# Altium PCB pay-optical.PcbDoc (part 2 of 5)
Units mm, origin at the board's own origin, x right, y up, seen from the top; angles counter-clockwise.
Board outline 128 x 54 mm, 4 copper layers (Top Layer, GND, VCC, Bottom Layer), stack 0.778 mm thick; 461 components, 247 nets, 1368 pads, 498 vias.
Unrouted connection lines stored in the file: 117.
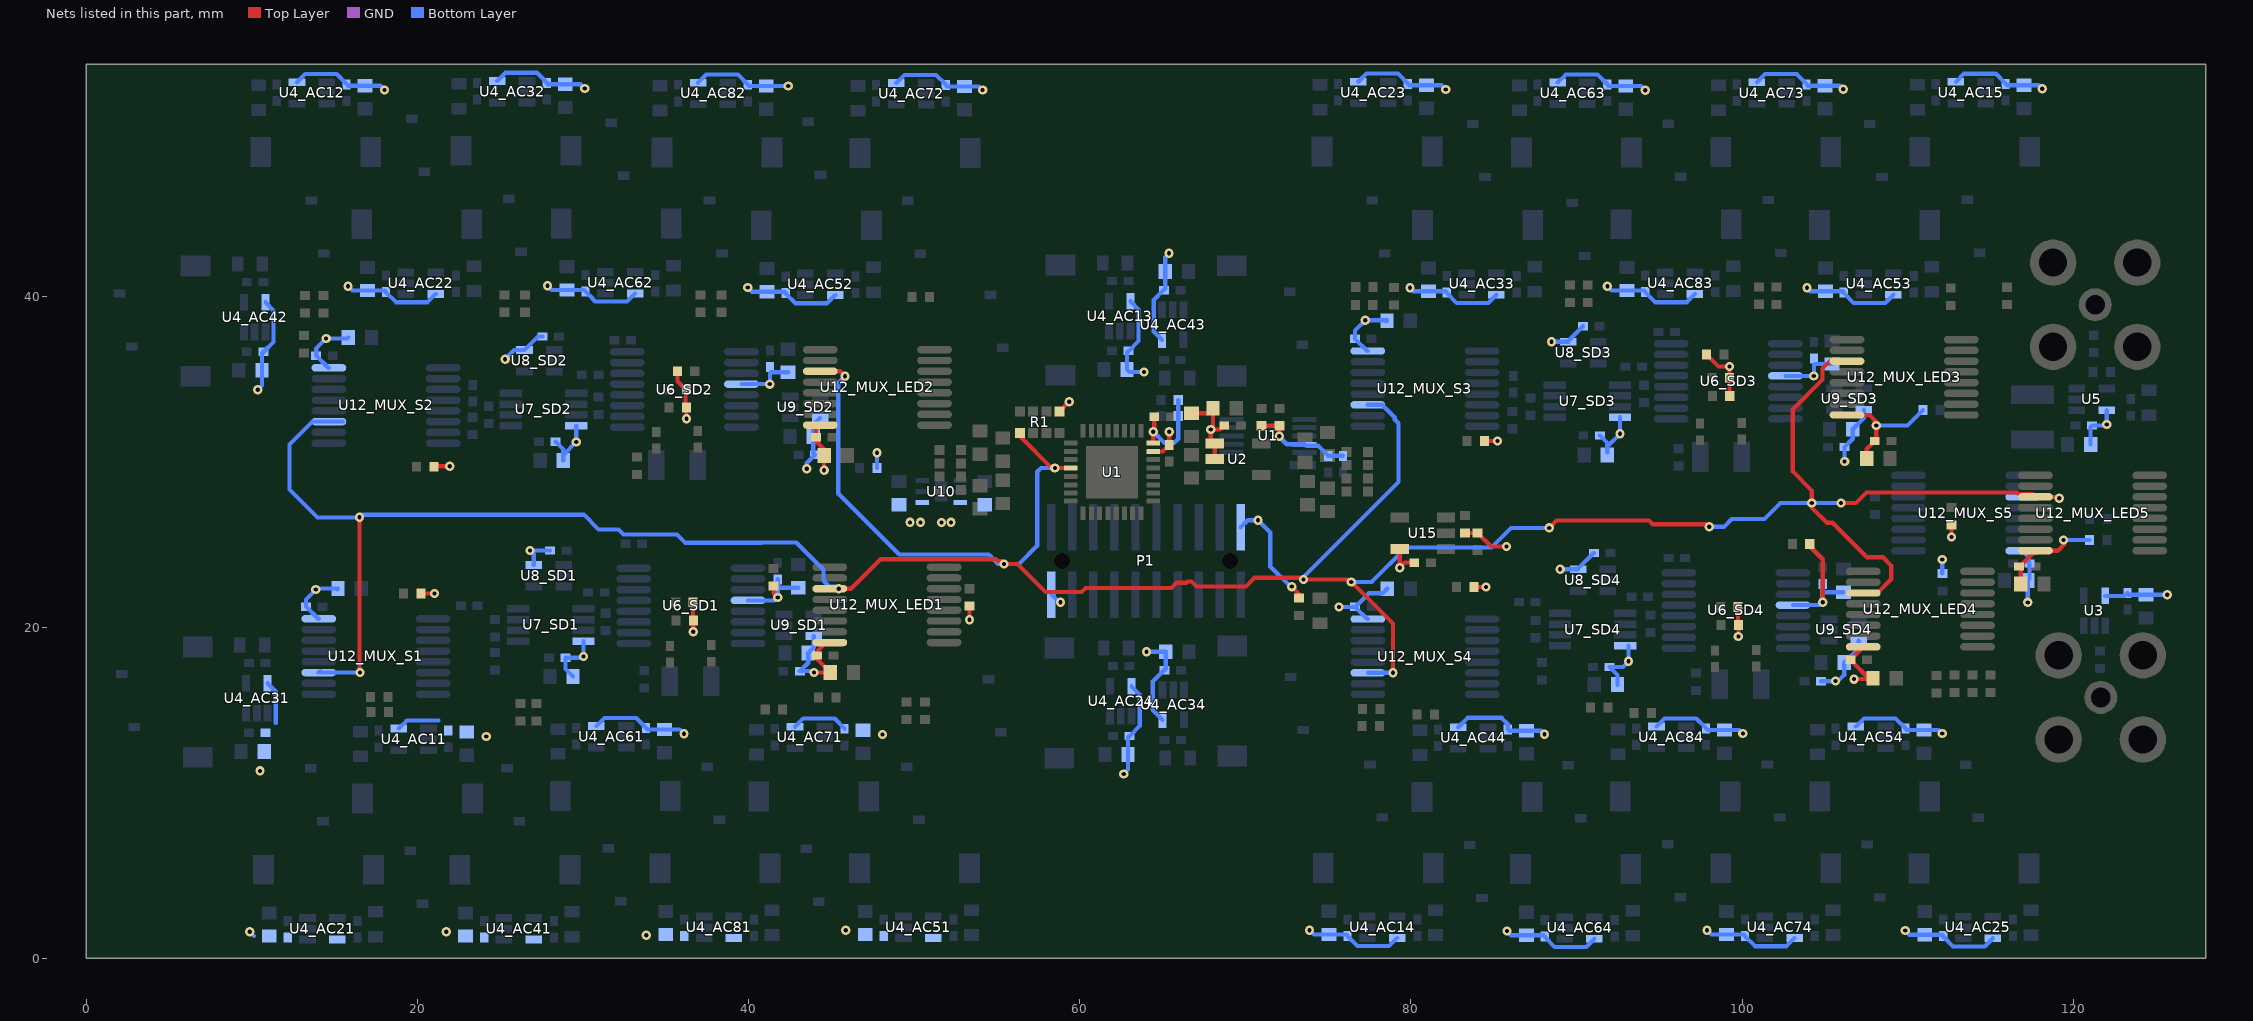
[diagram p4: the nets of this part, all layers, seen from the top]

## Components (designator, comment, footprint, x,y, rotation, side; value= is the part's Value field where it differs from the comment) (continued)
R8_AC71 "330" 0402#2 49.53,14.961 r270 top (schematic designator R8)
R8_AC72 "330" 0402#2 50.394,39.929 r180 top (schematic designator R8)
R8_AC73 "330" 0402#2 102.083,40.022 r90 top (schematic designator R8)
R8_AC74 "330" 0402#2 112.827,16.586 r270 top (schematic designator R8)
R8_AC81 "330" 0402#2 41.529,15.037 r180 top (schematic designator R8)
R8_AC82 "330" 0402#2 37.1,39.548 r90 top (schematic designator R8)
R8_AC83 "330" 0402#2 101.016,40.03 r90 top (schematic designator R8)
R8_AC84 "330" 0402#2 111.735,16.561 r270 top (schematic designator R8)
R9_SD1 "Optional" 0402#2 24.676,19.939 r270 bottom (schematic designator R9)
R9_SD2 "Optional" 0402#2 24.308,32.817 r270 bottom (schematic designator R9)
R9_SD3 "Optional" 0402#2 87.224,33.325 r270 bottom (schematic designator R9)
R9_SD4 "Optional" 0402#2 87.528,19.888 r270 bottom (schematic designator R9)
R10_AC11 "1M" J1-0603 16.558,12.946 r90 bottom (schematic designator R10)
R10_AC12 "1M" J1-0603 10.418,51.982 r90 bottom (schematic designator R10)
R10_AC13 "1M" J1-0603 62.133,41.997 r0 bottom (schematic designator R10)
R10_AC14 "1M" J1-0603 81.48,2.165 r270 bottom (schematic designator R10)
R10_AC15 "1M" J1-0603 110.6,52.006 r90 bottom (schematic designator R10)
R10_AC21 "1M" J1-0603 17.478,2.07 r270 bottom (schematic designator R10)
R10_AC22 "1M" J1-0603 23.416,41.052 r270 bottom (schematic designator R10)
R10_AC23 "1M" J1-0603 74.504,52.011 r90 bottom (schematic designator R10)
R10_AC24 "1M" J1-0603 62.195,18.742 r0 bottom (schematic designator R10)
R10_AC25 "1M" J1-0603 117.453,2.148 r270 bottom (schematic designator R10)
R10_AC31 "1M" J1-0603 10.027,18.926 r0 bottom (schematic designator R10)
R10_AC32 "1M" J1-0603 22.507,52.064 r90 bottom (schematic designator R10)
R10_AC33 "1M" J1-0603 87.475,41.01 r270 bottom (schematic designator R10)
R10_AC34 "1M" J1-0603 65.921,12.097 r180 bottom (schematic designator R10)
R10_AC41 "1M" J1-0603 29.339,2.07 r270 bottom (schematic designator R10)
R10_AC42 "1M" J1-0603 9.891,41.939 r0 bottom (schematic designator R10)
R10_AC43 "1M" J1-0603 65.891,35.05 r180 bottom (schematic designator R10)
R10_AC44 "1M" J1-0603 80.542,13.031 r90 bottom (schematic designator R10)
R10_AC51 "1M" J1-0603 53.469,2.162 r270 bottom (schematic designator R10)
R10_AC52 "1M" J1-0603 47.547,40.984 r270 bottom (schematic designator R10)
R10_AC53 "1M" J1-0603 111.448,41.01 r270 bottom (schematic designator R10)
R10_AC54 "1M" J1-0603 104.555,13.068 r90 bottom (schematic designator R10)
R10_AC61 "1M" J1-0603 28.502,13.101 r90 bottom (schematic designator R10)
R10_AC62 "1M" J1-0603 35.456,41.086 r270 bottom (schematic designator R10)
R10_AC63 "1M" J1-0603 86.547,51.963 r90 bottom (schematic designator R10)
R10_AC64 "1M" J1-0603 93.393,2.117 r270 bottom (schematic designator R10)
R10_AC71 "1M" J1-0603 40.491,13.062 r90 bottom (schematic designator R10)
R10_AC72 "1M" J1-0603 46.605,51.934 r90 bottom (schematic designator R10)
R10_AC73 "1M" J1-0603 98.58,51.98 r90 bottom (schematic designator R10)
R10_AC74 "1M" J1-0603 105.483,2.162 r270 bottom (schematic designator R10)
R10_AC81 "1M" J1-0603 41.424,2.162 r270 bottom (schematic designator R10)
R10_AC82 "1M" J1-0603 34.642,51.954 r90 bottom (schematic designator R10)
R10_AC83 "1M" J1-0603 99.462,41.053 r270 bottom (schematic designator R10)
R10_AC84 "1M" J1-0603 92.515,13.073 r90 bottom (schematic designator R10)
R11 "10K" 0402#2 108.026,27.33 r270 bottom
R12 "10K" 0402#2 121.5,26.525 r0 bottom
R13 "1 Ohm" J1-0603 124.562,33.553 r90 bottom value=1Ohm
R14_SD1 "0 Ohm" 0402#2 33.698,16.853 r90 bottom (schematic designator R14)
R14_SD2 "0 Ohm" 0402#2 33.274,29.743 r270 top (schematic designator R14)
R14_SD3 "0 Ohm" 0402#2 96.144,30.255 r270 bottom (schematic designator R14)
R14_SD4 "0 Ohm" 0402#2 97.217,16.713 r90 bottom (schematic designator R14)
R15_SD1 "10K" 0402#2 36.139,20.415 r0 top (schematic designator R15)
R15_SD2 "10K" 0402#2 35.723,33.275 r0 top (schematic designator R15)
R15_SD3 "10K" 0402#2 98.724,33.972 r0 top (schematic designator R15)
R15_SD4 "10K" 0402#2 99.247,20.135 r0 top (schematic designator R15)
R16_SD1 "200" 0402#2 31.369,20.32 r90 bottom (schematic designator R16)
R16_SD2 "200" 0402#2 30.933,33.377 r90 bottom (schematic designator R16)
R16_SD3 "200" 0402#2 94.082,34.087 r90 bottom (schematic designator R16)
R16_SD4 "200" 0402#2 94.46,20.212 r90 bottom (schematic designator R16)
R17_SD1 "10K" 0402#2 41.504,23.012 r270 top (schematic designator R17)
R17_SD2 "10K" 0402#2 36.225,35.457 r180 top (schematic designator R17)
R17_SD3 "10K" 0402#2 98.375,36.475 r180 top (schematic designator R17)
R17_SD4 "10K" 0402#2 103.559,25.025 r0 top (schematic designator R17)
R18_SD1 "10K" 0402#2 36.125,21.507 r0 top (schematic designator R18)
R18_SD2 "10K" 0402#2 35.725,34.363 r0 top (schematic designator R18)
R18_SD3 "10K" 0402#2 98.71,35.064 r0 top (schematic designator R18)
R18_SD4 "10K" 0402#2 99.233,21.228 r0 top (schematic designator R18)
R19_SD1 "50K" 0402#2 24.676,17.946 r90 bottom (schematic designator R19)
R19_SD2 "50K" 0402#2 23.317,32.156 r90 bottom (schematic designator R19)
R19_SD3 "50K" 0402#2 86.131,32.512 r90 bottom (schematic designator R19)
R19_SD4 "50K" 0402#2 87.909,17.348 r90 bottom (schematic designator R19)
R20 "Res3" 0402#2 73.25,21.229 r90 top value=330
R27_MUX_LED1 "Open" 0402#2 53.345,21.801 r270 top (schematic designator R27)
R27_MUX_LED2 "Open" 0402#2 47.233,29.616 r0 bottom (schematic designator R27)
R27_MUX_LED3 "Open" 0402#2 111.442,33.108 r180 bottom (schematic designator R27)
R27_MUX_LED4 "Open" 0402#2 84.025,25.175 r90 top (schematic designator R27)
R27_MUX_LED5 "Open" 0402#2 121.5,25.275 r180 bottom (schematic designator R27)
R27_MUX_S1 "Open" 0402#2 19.685,22.034 r0 top (schematic designator R27)
R27_MUX_S2 "Open" 0402#2 20.477,29.693 r0 top (schematic designator R27)
R27_MUX_S3 "Open" 0402#2 83.918,31.242 r0 top (schematic designator R27)
R27_MUX_S4 "Open" 0402#2 112.09,22.718 r90 bottom (schematic designator R27)
R27_MUX_S5 "Open" 0402#2 112.649,26.695 r270 top (schematic designator R27)
R35 "1M" 0402#2 121.717,35.411 r180 bottom
R36 "100" 0402#2 121.615,18.034 r90 bottom
R37 "1M" 0402#2 121.234,37.109 r90 bottom
R38 "1m" 14-1210 117.526,32.69 r90 bottom
U1 "DAC7562" SOP10-50P300X300-10N 69.176,30.55 r0 bottom
U1 "AD7194" QFN50P500X500X100-32N 61.951,29.362 r0 top
U2 "ADR391" SOT-23-5_95P290X160-5N 68.156,31.104 r0 top
U3 "AD8605" SOP-65P200X125-5N 121.925,20.089 r90 bottom
U4_AC11 "AD8605" SOP-65P200X125-5N 20.67,13.875 r180 bottom (schematic designator U4)
U4_AC12 "AD8605" SOP-65P200X125-5N 14.53,52.911 r180 bottom (schematic designator U4)
U4_AC13 "AD8605" SOP-65P200X125-5N 63.063,37.884 r90 bottom (schematic designator U4)
U4_AC14 "AD8605" SOP-65P200X125-5N 77.368,1.235 r0 bottom (schematic designator U4)
U4_AC15 "AD8605" SOP-65P200X125-5N 114.712,52.935 r180 bottom (schematic designator U4)
U4_AC21 "AD8605" SOP-65P200X125-5N 13.365,1.14 r0 bottom (schematic designator U4)
U4_AC22 "AD8605" SOP-65P200X125-5N 19.303,40.123 r0 bottom (schematic designator U4)
U4_AC23 "AD8605" SOP-65P200X125-5N 78.616,52.941 r180 bottom (schematic designator U4)
U4_AC24 "AD8605" SOP-65P200X125-5N 63.125,14.63 r90 bottom (schematic designator U4)
U4_AC25 "AD8605" SOP-65P200X125-5N 113.341,1.219 r0 bottom (schematic designator U4)
U4_AC31 "AD8605" SOP-65P200X125-5N 10.956,14.813 r90 bottom (schematic designator U4)
U4_AC32 "AD8605" SOP-65P200X125-5N 26.619,52.993 r180 bottom (schematic designator U4)
U4_AC33 "AD8605" SOP-65P200X125-5N 83.363,40.08 r0 bottom (schematic designator U4)
U4_AC34 "AD8605" SOP-65P200X125-5N 64.992,16.209 r270 bottom (schematic designator U4)
U4_AC41 "AD8605" SOP-65P200X125-5N 25.227,1.14 r0 bottom (schematic designator U4)
U4_AC42 "AD8605" SOP-65P200X125-5N 10.821,37.827 r90 bottom (schematic designator U4)
U4_AC43 "AD8605" SOP-65P200X125-5N 64.962,39.162 r270 bottom (schematic designator U4)
U4_AC44 "AD8605" SOP-65P200X125-5N 84.655,13.96 r180 bottom (schematic designator U4)
U4_AC51 "AD8605" SOP-65P200X125-5N 49.357,1.233 r0 bottom (schematic designator U4)
U4_AC52 "AD8605" SOP-65P200X125-5N 43.434,40.055 r0 bottom (schematic designator U4)
U4_AC53 "AD8605" SOP-65P200X125-5N 107.336,40.08 r0 bottom (schematic designator U4)
U4_AC54 "AD8605" SOP-65P200X125-5N 108.667,13.997 r180 bottom (schematic designator U4)
U4_AC61 "AD8605" SOP-65P200X125-5N 32.614,14.03 r180 bottom (schematic designator U4)
U4_AC62 "AD8605" SOP-65P200X125-5N 31.344,40.156 r0 bottom (schematic designator U4)
U4_AC63 "AD8605" SOP-65P200X125-5N 90.659,52.893 r180 bottom (schematic designator U4)
U4_AC64 "AD8605" SOP-65P200X125-5N 89.281,1.188 r0 bottom (schematic designator U4)
U4_AC71 "AD8605" SOP-65P200X125-5N 44.603,13.992 r180 bottom (schematic designator U4)
U4_AC72 "AD8605" SOP-65P200X125-5N 50.718,52.863 r180 bottom (schematic designator U4)
U4_AC73 "AD8605" SOP-65P200X125-5N 102.692,52.909 r180 bottom (schematic designator U4)
U4_AC74 "AD8605" SOP-65P200X125-5N 101.371,1.233 r0 bottom (schematic designator U4)
U4_AC81 "AD8605" SOP-65P200X125-5N 37.311,1.233 r0 bottom (schematic designator U4)
U4_AC82 "AD8605" SOP-65P200X125-5N 38.754,52.884 r180 bottom (schematic designator U4)
U4_AC83 "AD8605" SOP-65P200X125-5N 95.349,40.123 r0 bottom (schematic designator U4)
U4_AC84 "AD8605" SOP-65P200X125-5N 96.627,14.003 r180 bottom (schematic designator U4)
U5 "AD8605" SOP-65P200X125-5N 120.218,33.108 r0 bottom
U6_SD1 "ADA2200" SSOP16_N 36.514,21.293 r0 bottom (schematic designator U6)
U6_SD2 "ADA2200" SSOP16_N 36.123,34.355 r0 bottom (schematic designator U6)
U6_SD3 "ADA2200" SSOP16_N 99.164,34.853 r0 bottom (schematic designator U6)
U6_SD4 "ADA2200" SSOP16_N 99.622,21.013 r0 bottom (schematic designator U6)
U7_SD1 "AD8227" SOP8-65P300X300-8N 26.084,19.162 r0 bottom (schematic designator U7)
U7_SD2 "AD8227" SOP8-65P300X300-8N 25.637,32.177 r0 bottom (schematic designator U7)
U7_SD3 "AD8227" SOP8-65P300X300-8N 88.678,32.674 r0 bottom (schematic designator U7)
U7_SD4 "AD8227" SOP8-65P300X300-8N 89.002,18.883 r0 bottom (schematic designator U7)
U8_SD1 "AD8613" SOP-65P200X125-5N 28.829,23.764 r180 bottom (schematic designator U8)
U8_SD2 "AD8613" SOP-65P200X125-5N 28.266,36.737 r180 bottom (schematic designator U8)
U8_SD3 "AD8613" SOP-65P200X125-5N 91.307,37.234 r180 bottom (schematic designator U8)
U8_SD4 "AD8613" SOP-65P200X125-5N 91.894,23.495 r180 bottom (schematic designator U8)
U9_SD1 "AD8613" SOP-65P200X125-5N 42.139,19.467 r0 bottom (schematic designator U9)
U9_SD2 "AD8613" SOP-65P200X125-5N 42.516,32.638 r0 bottom (schematic designator U9)
U9_SD3 "AD8613" SOP-65P200X125-5N 105.556,33.136 r0 bottom (schematic designator U9)
U9_SD4 "AD8613" SOP-65P200X125-5N 105.246,19.187 r0 bottom (schematic designator U9)
U10 "LP5900" DFN220X250X80-7N 51.643,28.19 r0 bottom
U12_MUX_LED1 "ADG658" SSOP16_N 48.357,21.35 r180 top (schematic designator U12)
U12_MUX_LED2 "ADG658" SSOP16_N 47.782,34.482 r180 top (schematic designator U12)
U12_MUX_LED3 "ADG658" SSOP16_N 109.783,35.092 r180 top (schematic designator U12)
U12_MUX_LED4 "ADG658" SSOP16_N 110.765,21.093 r180 top (schematic designator U12)
U12_MUX_LED5 "ADG658" SSOP16_N 121.162,26.896 r180 top (schematic designator U12)
U12_MUX_S1 "ADG658" SSOP16_N 17.496,18.236 r180 bottom (schematic designator U12)
U12_MUX_S2 "ADG658" SSOP16_N 18.105,33.391 r180 bottom (schematic designator U12)
U12_MUX_S3 "ADG658" SSOP16_N 80.843,34.407 r180 bottom (schematic designator U12)
U12_MUX_S4 "ADG658" SSOP16_N 80.85,18.222 r180 bottom (schematic designator U12)
U12_MUX_S5 "ADG658" SSOP16_N 113.492,26.891 r0 bottom (schematic designator U12)
U15 "MCP6546" SOT-23-5_95P290X160-5N 82.121,24.725 r180 top
Y1_SD1 "32.768kHz" ABS07-120-32.768 36.499,16.739 r180 bottom (schematic designator Y1)
Y1_SD2 "32.768kHz" ABS07-120-32.768 35.683,29.791 r180 bottom (schematic designator Y1)
Y1_SD3 "32.768kHz" ABS07-120-32.768 98.724,30.289 r180 bottom (schematic designator Y1)
Y1_SD4 "32.768kHz" ABS07-120-32.768 99.898,16.561 r180 bottom (schematic designator Y1)

## Footprints (in the part's own frame and the unit in brackets; to place one, negate y for a bottom-side part, rotate by r counter-clockwise, add the part's x,y. Pads: shape width x height; smd on the part's side, far side on the other; paste and mask are expansions set on the pad)
14-1210 [mm] "Chip Resistor, Body 3.2x2.5mm, IPC High Density"
  rect 1.1x2.6 smd: 1(-1.35,0) 2(1.35,0)
  silkscreen extent -0.4,-1.2 0.4,1.2, body extent -1.68,-1.32 1.68,1.32, height 0.9
0402#1 [mm] "Chip Capacitor, Body 1.0x0.5mm, IPC High Density"
  rect 0.6x0.5 smd: 1(-0.5,0) 2(0.5,0)
  body extent -0.55,-0.3 0.55,0.3, height 1.3
0402#2 [mm] "0402 Resistor"
  rect 0.55x0.6 smd: 1(-0.525,0) 2(0.525,0)
  silkscreen extent -0.08,-0.22 0.07,0.23
0603-LED [mm]
  rect 0.7x0.9 smd: 1(-0.75,0) 2(0.75,0)
  silkscreen extent -1.32,-0.67 1.5,0.67, body extent -0.85,-0.48 0.85,0.48, height 0.9
1608[0603] [mm] "Chip Capacitor, Body 1.6x0.8mm, IPC High Density"
  rect 0.8x0.9 smd: 1(-0.7,0) 2(0.7,0)
  body extent -0.87,-0.48 0.87,0.48, height 1.3
ABS07-120-32.768 [mm] "32.768 kHz crystal"
  rect 1x1.8 smd: 1(-1.25,0) 2(1.25,0)
  silkscreen extent -0.43,-0.86 0.43,0.86
CON20_2X10_DUA00 [mil]
  rect 20x110 smd: 1(225,-80) 2(225,80) 3(175,-80) 4(175,80) 5(125,-80) 6(125,80) 7(75,-80) 8(75,80) 9(25,-80) 10(25,80) 11(-25,-80) 12(-25,80) 13(-75,-80) 14(-75,80) 15(-125,-80) 16(-125,80) 17(-175,-80) 18(-175,80) 19(-225,-80) 20(-225,80)
  round 38 / inner round 60 / far side round 38 hole 38: 21(-200,0) 22(200,0)
  silkscreen extent -255,-200 255,73, body extent 0,0 10,10, height 10
DFN220X250X80-7N [mil]
  rect 32x12 smd: 1(-45,26) 2(-45,0) 3(-45,-26) 4(45,-26) 5(45,0) 6(45,26)
  rect 30x47 smd: 7(0,0)
  silkscreen extent -86,18 -70,34
J1-0603 [mm] "Chip Resistor, Body 1.6x0.8mm, IPC High Density"
  rect 0.7x0.9 smd: 1(-0.75,0) 2(0.75,0)
  silkscreen extent -0.2,-0.35 0.2,0.35, body extent -0.85,-0.48 0.85,0.48, height 0.9
"LB P4SG" [mm] "Footprint for a reverse-mount Osram LED"
  rect 0.5x0.7 smd far side mask+0.102: 1(-1.6,-0.375) 2(1.6,0.375)
MCX5.08-H5 [mm] "Coaxial, through hole, straight."
  round 2 hole 1.2: 1(-0.002,-0.009)
  round 2.8 hole 1.7: 2(2.538,-2.549) 3(2.538,2.531) 4(-2.542,2.531) 5(-2.542,-2.549)
  silkscreen extent -3,-3.01 3,2.99
QFN50P500X500X100-32N [mil]
  rect 32x12 smd: 1(-98,69) 2(-98,49) 3(-98,30) 4(-98,10) 5(-98,-10) 6(-98,-30) 7(-98,-49) 8(-98,-69) 17(98,-69) 18(98,-49) 19(98,-30) 20(98,-10) 21(98,10) 22(98,30) 23(98,49) 24(98,69)
  rect 12x32 smd: 9(-69,-98) 10(-49,-98) 11(-30,-98) 12(-10,-98) 13(10,-98) 14(30,-98) 15(49,-98) 16(69,-98) 25(69,98) 26(49,98) 27(30,98) 28(10,98) 29(-10,98) 30(-30,98) 31(-49,98) 32(-69,98)
  rect 124x124 smd: 33(0,0)
  silkscreen extent -101,-101 101,101
ResQuad-320X150 [mm] "Concave terminal quad pack resistor."
  rect 0.6x0.6 smd: 1(-1.2,-0.65) 2(-0.4,-0.65) 3(0.4,-0.65) 4(1.2,-0.65) 5(1.2,0.65) 6(0.4,0.65) 7(-0.4,0.65) 8(-1.2,0.65)
  silkscreen extent -1.73,-0.62 1.75,0.65
SOP8-65P300X300-8N [mm]
  rect 1.35x0.45 smd: 1(0,0) 2(0,-0.65) 3(0,-1.3) 4(0,-1.95) 5(3.95,-1.95) 6(3.95,-1.3) 7(3.95,-0.65) 8(3.95,0)
  silkscreen extent 0,-2.28 2.9,0.58
SOP10-50P300X300-10N [mm]
  rect 1.45x0.3 smd: 1(0,0) 2(0,-0.5) 3(0,-1) 4(0,-1.5) 5(0,-2) 6(4.4,-2) 7(4.4,-1.5) 8(4.4,-1) 9(4.4,-0.5) 10(4.4,0)
  silkscreen extent -0.15,-2.25 3.38,0.81
SOP-65P200X125-5N [mm]
  rect 1x0.47 smd: 1(0,0) 2(0,-0.65) 3(0,-1.3) 4(1.8,-1.3) 5(1.8,0)
  silkscreen extent -0.42,-1.85 1.8,0.57
SOT-23-5_95P290X160-5N [mm]
  rect 1.1x0.6 smd: 1(0,0) 2(0,-0.95) 3(0,-1.9) 4(2.8,-1.9) 5(2.8,0)
  silkscreen extent -0.99,-2.16 1.96,0.25
SSOP16_N [mm] "SOP, 16-Leads, Body 6.2x5.3mm, Pitch 0.65mm, IPC Medium Density"
  oval 2.1x0.45 smd: 1(-3.45,2.275) 2(-3.45,1.625) 3(-3.45,0.975) 4(-3.45,0.325) 5(-3.45,-0.325) 6(-3.45,-0.975) 7(-3.45,-1.625) 8(-3.45,-2.275) 9(3.45,-2.275) 10(3.45,-1.625) 11(3.45,-0.975) 12(3.45,-0.325) 13(3.45,0.325) 14(3.45,0.975) 15(3.45,1.625) 16(3.45,2.275)
  silkscreen extent -3.57,-3.25 2,3.25, body extent -2.7,-3.25 2.7,3.25, height 2
VBPW34SR [mm] "Silicon PIN photodiode"
  rect 1.25x1.8 smd far side: 1(-3.325,0) 2(3.325,0)
  Keep-Out Layer board cut-out: -2.25,2 2.25,2 2.25,-2 -2.25,-2

## Part data
C1 C2 C3 C4 C5 C6 C7 C8 C9 C10 C11 C13 C14 C15 C16 C17_AC11 C17_AC12 C17_AC13 C17_AC14 C17_AC15 C17_AC21 C17_AC22 C17_AC23 C17_AC24 C17_AC25 C17_AC31 C17_AC32 C17_AC33 C17_AC34 C17_AC41 C17_AC42 C17_AC43 C17_AC44 C17_AC51 C17_AC52 C17_AC53 C17_AC54 C17_AC61 C17_AC62 C17_AC63 C17_AC64 C17_AC71 C17_AC72 C17_AC73 C17_AC74 C17_AC81 C17_AC82 C17_AC83 C17_AC84 C18 C19 C20_AC11 C20_AC12 C20_AC13 C20_AC14 C20_AC15 C20_AC21 C20_AC22 C20_AC23 C20_AC24 C20_AC25 C20_AC31 C20_AC32 C20_AC33 C20_AC34 C20_AC41 C20_AC42 C20_AC43 C20_AC44 C20_AC51 C20_AC52 C20_AC53 C20_AC54 C20_AC61 C20_AC62 C20_AC63 C20_AC64 C20_AC71 C20_AC72 C20_AC73 C20_AC74 C20_AC81 C20_AC82 C20_AC83 C20_AC84 C21_AC11 C21_AC12 C21_AC13 C21_AC14 C21_AC15 C21_AC21 C21_AC22 C21_AC23 C21_AC24 C21_AC25 C21_AC31 C21_AC32 C21_AC33 C21_AC34 C21_AC41 C21_AC42 C21_AC43 C21_AC44 C21_AC51 C21_AC52 C21_AC53 C21_AC54 C21_AC61 C21_AC62 C21_AC63 C21_AC64 C21_AC71 C21_AC72 C21_AC73 C21_AC74 C21_AC81 C21_AC82 C21_AC83 C21_AC84 C22 C23 C24 C25_SD1 C25_SD2 C25_SD3 C25_SD4 C26_SD1 C26_SD2 C26_SD3 C26_SD4 C27_SD1 C27_SD2 C27_SD3 C27_SD4 C28_SD1 C28_SD2 C28_SD3 C28_SD4 C29_SD1 C29_SD2 C29_SD3 C29_SD4 C30_SD1 C30_SD2 C30_SD3 C30_SD4 C31_SD1 C31_SD2 C31_SD3 C31_SD4 C32_SD1 C32_SD2 C32_SD3 C32_SD4 C33_SD1 C33_SD2 C33_SD3 C33_SD4 C34_SD1 C34_SD2 C34_SD3 C34_SD4 C35_SD1 C35_SD2 C35_SD3 C35_SD4 C36_SD1 C36_SD2 C36_SD3 C36_SD4 C37 C44_MUX_LED1 C44_MUX_LED2 C44_MUX_LED3 C44_MUX_LED4 C44_MUX_LED5 C44_MUX_S1 C44_MUX_S2 C44_MUX_S3 C44_MUX_S4 C44_MUX_S5 C45_MUX_LED1 C45_MUX_LED2 C45_MUX_LED3 C45_MUX_LED4 C45_MUX_LED5 C45_MUX_S1 C45_MUX_S2 C45_MUX_S3 C45_MUX_S4 C45_MUX_S5: library part "Cap Semi", "Capacitor (Semiconductor SIM Model)", LatestRevisionDate=29-May-2009, LatestRevisionNote="IPC-7351 Footprint Added.", PackageDescription="Chip Capacitor", PackageReference=C1206, Published=8-Jun-2000, Publisher="Altium Limited", Supplier=Digi-Key
C1: library part "Cap Semi", "Capacitor (Semiconductor SIM Model)", Supplier Part Number=587-3807-1-ND, LatestRevisionDate=29-May-2009, LatestRevisionNote="IPC-7351 Footprint Added.", PackageDescription="Chip Capacitor", PackageReference=C1206, Published=8-Jun-2000, Publisher="Altium Limited", Supplier=Digi-Key
C2: library part "Cap Semi", "Capacitor (Semiconductor SIM Model)", Supplier Part Number=1276-1632-1-ND, LatestRevisionDate=29-May-2009, LatestRevisionNote="IPC-7351 Footprint Added.", PackageDescription="Chip Capacitor", PackageReference=C1206, Published=8-Jun-2000, Publisher="Altium Limited", Supplier=Digi-Key
C3: library part "Cap Semi", "Capacitor (Semiconductor SIM Model)", Supplier Part Number=1276-1972-1-ND, LatestRevisionDate=29-May-2009, LatestRevisionNote="IPC-7351 Footprint Added.", PackageDescription="Chip Capacitor", PackageReference=C1206, Published=8-Jun-2000, Publisher="Altium Limited", Supplier=Digi-Key
C12: "Capacitor (Semiconductor SIM Model)", LatestRevisionDate=29-May-2009, LatestRevisionNote="IPC-7351 Footprint Added.", PackageDescription="Chip Capacitor", PackageReference=C1206, Published=8-Jun-2000, Publisher="Altium Limited"
D1_AC11 D1_AC12 D1_AC13 D1_AC14 D1_AC15 D1_AC21 D1_AC22 D1_AC23 D1_AC24 D1_AC25 D1_AC31 D1_AC32 D1_AC33 D1_AC34 D1_AC41 D1_AC42 D1_AC43 D1_AC44 D1_AC51 D1_AC52 D1_AC53 D1_AC54 D1_AC61 D1_AC62 D1_AC63 D1_AC64 D1_AC71 D1_AC72 D1_AC73 D1_AC74 D1_AC81 D1_AC82 D1_AC83 D1_AC84: "Typical RED, GREEN, YELLOW, AMBER GaAs LED", Supplier Part Number=475-2814-1-ND, LatestRevisionDate=17-Jul-2002, LatestRevisionNote="Re-released for DXP Platform.", PackageDescription="SM LED; 2 Flat Leads", PackageReference=3.2X1.6X1.1, PackageVersion=Feb-2002, Published=8-Jun-2000, Publisher="Altium Limited", Supplier=Digi-Key
D2_AC11 D2_AC12 D2_AC13 D2_AC14 D2_AC15 D2_AC21 D2_AC22 D2_AC23 D2_AC24 D2_AC25 D2_AC31 D2_AC32 D2_AC33 D2_AC34 D2_AC41 D2_AC42 D2_AC43 D2_AC44 D2_AC51 D2_AC52 D2_AC53 D2_AC54 D2_AC61 D2_AC62 D2_AC63 D2_AC64 D2_AC71 D2_AC72 D2_AC73 D2_AC74 D2_AC81 D2_AC82 D2_AC83 D2_AC84: library part "Photo Sen", "Photosensitive Diode", Supplier Part Number=751-1501-1-ND, LatestRevisionDate=17-Jul-2002, LatestRevisionNote="Re-released for DXP Platform.", PackageReference=PIN2, Published=24-Mar-1999, Publisher="Altium Limited", Supplier=Digi-Key
D3: "Typical RED, GREEN, YELLOW, AMBER GaAs LED", LatestRevisionDate=17-Jul-2002, LatestRevisionNote="Re-released for DXP Platform.", PackageDescription="SM LED; 2 Flat Leads", PackageReference=3.2X1.6X1.1, PackageVersion=Feb-2002, Published=8-Jun-2000, Publisher="Altium Limited"
J1 J2: "RF Coaxial PCB Connector, MCX; Thru-Hole, Right-Angle Mount Socket, Blunt Post Terminal, 50 Ohm Impedance", PackageDocument=04-Jul-1999, ComponentLink1Description="Manufacturer Link", ComponentLink1URL=http://www.amphenolrf.com/, DatasheetDocument=30-May-2003, DrillSize="Corresponds to nominal value.", LatestRevisionDate=15-Jul-2004, LatestRevisionNote="Component Replaced.", PackageReference=919-119J-51AX, PCB_Layout="Complies with manufacturer's recommendation.", Published=15-Jul-2004, Publisher="Altium Limited"
P1: "Header, 10-Pin, Dual row", LatestRevisionDate=17-Jul-2002, LatestRevisionNote="Re-released for DXP Platform.", Publisher="Altium Limited"
R1: library part "Res Quad Pack", "Quad pack resistor", Supplier Part Number=Y4103CT-ND, Supplier=Digi-Key
R2 R5: library part "Res Quad Pack", "Quad pack resistor", Supplier Part Number=Y4102CT-ND, Supplier=Digi-Key
R3 R3 R4 R4 R8_AC11 R8_AC12 R8_AC13 R8_AC14 R8_AC15 R8_AC21 R8_AC22 R8_AC23 R8_AC24 R8_AC25 R8_AC31 R8_AC32 R8_AC33 R8_AC34 R8_AC41 R8_AC42 R8_AC43 R8_AC44 R8_AC51 R8_AC52 R8_AC53 R8_AC54 R8_AC61 R8_AC62 R8_AC63 R8_AC64 R8_AC71 R8_AC72 R8_AC73 R8_AC74 R8_AC81 R8_AC82 R8_AC83 R8_AC84 R10_AC11 R10_AC12 R10_AC13 R10_AC14 R10_AC15 R10_AC21 R10_AC22 R10_AC23 R10_AC24 R10_AC25 R10_AC31 R10_AC32 R10_AC33 R10_AC34 R10_AC41 R10_AC42 R10_AC43 R10_AC44 R10_AC51 R10_AC52 R10_AC53 R10_AC54 R10_AC61 R10_AC62 R10_AC63 R10_AC64 R10_AC71 R10_AC72 R10_AC73 R10_AC74 R10_AC81 R10_AC82 R10_AC83 R10_AC84 R11 R12 R13 R14_SD1 R14_SD2 R14_SD3 R14_SD4 R15_SD1 R15_SD2 R15_SD3 R15_SD4 R16_SD1 R16_SD2 R16_SD3 R16_SD4 R17_SD1 R17_SD2 R17_SD3 R17_SD4 R18_SD1 R18_SD2 R18_SD3 R18_SD4 R19_SD1 R19_SD2 R19_SD3 R19_SD4 R27_MUX_LED1 R27_MUX_LED2 R27_MUX_LED3 R27_MUX_LED4 R27_MUX_LED5 R27_MUX_S1 R27_MUX_S2 R27_MUX_S3 R27_MUX_S4 R27_MUX_S5 R35 R36 R37 R38: library part Res3, "Resistor", LatestRevisionDate=29-May-2009, LatestRevisionNote="IPC-7351 Footprint Added.", PackageDescription="Chip Resistor", PackageReference=J1-0603, Published=8-Jun-2000, Publisher="Altium Limited"
  R3 R3 R4 R4 R8_AC11 R8_AC12 R8_AC13 R8_AC14 R8_AC15 R8_AC21 R8_AC22 R8_AC23 R8_AC24 R8_AC25 R8_AC31 R8_AC32 R8_AC33 R8_AC34 R8_AC41 R8_AC42 R8_AC43 R8_AC44 R8_AC51 R8_AC52 R8_AC53 R8_AC54 R8_AC61 R8_AC62 R8_AC63 R8_AC64 R8_AC71 R8_AC72 R8_AC73 R8_AC74 R8_AC81 R8_AC82 R8_AC83 R8_AC84 R10_AC11 R10_AC12 R10_AC13 R10_AC14 R10_AC15 R10_AC21 R10_AC22 R10_AC23 R10_AC24 R10_AC25 R10_AC31 R10_AC32 R10_AC33 R10_AC34 R10_AC41 R10_AC42 R10_AC43 R10_AC44 R10_AC51 R10_AC52 R10_AC53 R10_AC54 R10_AC61 R10_AC62 R10_AC63 R10_AC64 R10_AC71 R10_AC72 R10_AC73 R10_AC74 R10_AC81 R10_AC82 R10_AC83 R10_AC84 R14_SD1 R14_SD2 R14_SD3 R14_SD4 R15_SD1 R15_SD2 R15_SD3 R15_SD4 R16_SD1 R16_SD2 R16_SD3 R16_SD4 R17_SD1 R17_SD2 R17_SD3 R17_SD4 R18_SD1 R18_SD2 R18_SD3 R18_SD4 R19_SD1 R19_SD2 R19_SD3 R19_SD4 R27_MUX_LED1 R27_MUX_LED2 R27_MUX_LED3 R27_MUX_LED4 R27_MUX_LED5 R27_MUX_S1 R27_MUX_S2 R27_MUX_S3 R27_MUX_S4 R27_MUX_S5: Supplier=Digi-Key
R6 R7 R20: "Resistor", LatestRevisionDate=29-May-2009, LatestRevisionNote="IPC-7351 Footprint Added.", PackageDescription="Chip Resistor", PackageReference=J1-0603, Published=8-Jun-2000, Publisher="Altium Limited"
R9_SD1 R9_SD2 R9_SD3 R9_SD4: library part Res3, "Optional resistor to set gain on inst amp.", LatestRevisionDate=29-May-2009, LatestRevisionNote="IPC-7351 Footprint Added.", PackageDescription="Chip Resistor", PackageReference=J1-0603, Published=8-Jun-2000, Publisher="Altium Limited"
U1: "12-bit, low-power, voltage-output DAC with internal reference.", Supplier Part Number 1=296-29022-1-ND, Supplier=Digi-Key, Supplier 1=Digi-Key
U1: "24-bit sigma-delta ADC", Supplier Part Number 1=AD7194BCPZ-REEL7-ND, Supplier=Digi-Key, Supplier 1=Digi-Key
U2: "2.5V reference voltage.", Supplier Part Number 1=ADR391AUJZREEL7CT-ND, Supplier=Digi-Key, Supplier 1=Digi-Key
U3 U4_AC11 U4_AC12 U4_AC13 U4_AC14 U4_AC15 U4_AC21 U4_AC22 U4_AC23 U4_AC24 U4_AC25 U4_AC31 U4_AC32 U4_AC33 U4_AC34 U4_AC41 U4_AC42 U4_AC43 U4_AC44 U4_AC51 U4_AC52 U4_AC53 U4_AC54 U4_AC61 U4_AC62 U4_AC63 U4_AC64 U4_AC71 U4_AC72 U4_AC73 U4_AC74 U4_AC81 U4_AC82 U4_AC83 U4_AC84 U5: "Low noise, precision rail-to-rail op-amp.", Supplier Part Number 1=AD8605ARTZREEL7CT-ND, Supplier=Digi-Key, Supplier 1=Digi-Key
U6_SD1 U6_SD2 U6_SD3 U6_SD4: "Synchronous demodulator and configurable analog filter.", Supplier=Digi-Key
U7_SD1 U7_SD2 U7_SD3 U7_SD4: "Rail-to-rail instrumentation amplifier. Can operate on single supply.", Supplier Part Number 1=AD8227BRMZ-ND, Supplier=Digi-Key, Supplier 1=Digi-Key
U8_SD1 U8_SD2 U8_SD3 U8_SD4 U9_SD1 U9_SD2 U9_SD3 U9_SD4: "Low power, low noise rail-to-rail op-amp.", Supplier=Digi-Key
U10: "Low noise 3V low dropout regulator for analog and RF applications.", Supplier Part Number 1=296-44695-1-ND, Supplier 1=Digi-Key
U12_MUX_LED1 U12_MUX_LED2 U12_MUX_LED3 U12_MUX_LED4 U12_MUX_LED5 U12_MUX_S1 U12_MUX_S2 U12_MUX_S3 U12_MUX_S4 U12_MUX_S5: "Eight channel analog multiplexer.", Supplier Part Number 1=ADG658YRUZ-ND, Supplier=Digi-Key, Supplier 1=Digi-Key
U15: "Open-drain output sub-microamp comparator.", Supplier Part Number 1=MCP6546T-E/OTCT-ND, Supplier 1=Digi-Key
Y1_SD1 Y1_SD2 Y1_SD3 Y1_SD4: library part XTAL, "Crystal Oscillator", Supplier Part Number=535-11937-1-ND, LatestRevisionDate=17-Jul-2002, LatestRevisionNote="Re-released for DXP Platform.", PackageDescription="Crystal, Thru-Hole; 2 Leads; Body 3.1 x 8.2 mm (Dia.xH)", PackageReference=R38, Published=8-Jun-2000, Publisher="Altium Limited", Supplier=Digi-Key

## Via types
v1: diameter 0.559, hole 0.254, Top Layer to Bottom Layer, 442 vias
v2: diameter 2.362, hole 2.1, Top Layer to Bottom Layer, 34 vias
v3: diameter 1.3, hole 1, Top Layer to Bottom Layer, 14 vias
v4: diameter 6, hole 3.6, Top Layer to Bottom Layer, 8 vias

## Nets (pads, with @x,y where several pads share a name; then routed paths per layer and width w, separated by ;. In a path a pad name is that pad's centre, name@x,y a point inside that pad or via, vN(x,y) a via of type N, cw(c..) or ccw(c..) an arc to the next point about the centre after c; other vN are vias at no path point)
3V: C1.2@75.9,30.35 C2.2@75,30.35 C9.2 C10.2 C12.2 C13.2 C14.2 C15.2 C19.2 C20_AC11.2 C20_AC12.2 C20_AC13.2 C20_AC14.2 C20_AC15.2 C20_AC21.2 C20_AC22.2 C20_AC23.2 C20_AC24.2 C20_AC25.2 C20_AC31.2 C20_AC32.2 C20_AC33.2 C20_AC34.2 C20_AC41.2 C20_AC42.2 C20_AC43.2 C20_AC44.2 C20_AC51.2 C20_AC52.2 C20_AC53.2 C20_AC54.2 C20_AC61.2 C20_AC62.2 C20_AC63.2 C20_AC64.2 C20_AC71.2 C20_AC72.2 C20_AC73.2 C20_AC74.2 C20_AC81.2 C20_AC82.2 C20_AC83.2 C20_AC84.2 C21_AC11.2 C21_AC12.2 C21_AC13.2 C21_AC14.2 C21_AC15.2 C21_AC21.2 C21_AC22.2 C21_AC23.2 C21_AC24.2 C21_AC25.2 C21_AC31.2 C21_AC32.2 C21_AC33.2 C21_AC34.2 C21_AC41.2 C21_AC42.2 C21_AC43.2 C21_AC44.2 C21_AC51.2 C21_AC52.2 C21_AC53.2 C21_AC54.2 C21_AC61.2 C21_AC62.2 C21_AC63.2 C21_AC64.2 C21_AC71.2 C21_AC72.2 C21_AC73.2 C21_AC74.2 C21_AC81.2 C21_AC82.2 C21_AC83.2 C21_AC84.2 C22.2 C23.2 C24.2 C29_SD1.2 C29_SD2.2 C29_SD3.2 C29_SD4.2 C31_SD1.1 C31_SD2.1 C31_SD3.1 C31_SD4.1 C32_SD1.2 C32_SD2.2 C32_SD3.2 C32_SD4.2 C33_SD1.2 C33_SD2.2 C33_SD3.2 C33_SD4.2 C34_SD1.2 C34_SD2.2 C34_SD3.2 C34_SD4.2 C35_SD1.2 C35_SD2.2 C35_SD3.2 C35_SD4.2 C36_SD1.2 C36_SD2.2 C36_SD3.2 C36_SD4.2 C44_MUX_LED1.2 C44_MUX_LED2.2 C44_MUX_LED3.2 C44_MUX_LED4.2 C44_MUX_LED5.2 C44_MUX_S1.2 C44_MUX_S2.2 C44_MUX_S3.2 C44_MUX_S4.2 C44_MUX_S5.2 C45_MUX_LED1.2 C45_MUX_LED2.2 C45_MUX_LED3.2 C45_MUX_LED4.2 C45_MUX_LED5.2 C45_MUX_S1.2 C45_MUX_S2.2 C45_MUX_S3.2 C45_MUX_S4.2 C45_MUX_S5.2 R1.5 R3.2@72.075,32.165 R4.2@70.985,32.165 R6.2 R7.2 R15_SD1.2 R15_SD2.2 R15_SD3.2 R15_SD4.2 R17_SD1.2 R17_SD2.2 R17_SD3.2 R17_SD4.2 R18_SD1.2 R18_SD2.2 R18_SD3.2 R18_SD4.2 R27_MUX_LED1.2 R27_MUX_LED2.2 R27_MUX_LED3.2 R27_MUX_LED4.2 R27_MUX_LED5.2 R27_MUX_S1.2 R27_MUX_S2.2 R27_MUX_S3.2 R27_MUX_S4.2 R27_MUX_S5.2 U1.9@73.576,31.05 U1.23 U2.1 U2.2 U3.5 U4_AC11.5 U4_AC12.5 U4_AC13.5 U4_AC14.5 U4_AC15.5 U4_AC21.5 U4_AC22.5 U4_AC23.5 U4_AC24.5 U4_AC25.5 U4_AC31.5 U4_AC32.5 U4_AC33.5 U4_AC34.5 U4_AC41.5 U4_AC42.5 U4_AC43.5 U4_AC44.5 U4_AC51.5 U4_AC52.5 U4_AC53.5 U4_AC54.5 U4_AC61.5 U4_AC62.5 U4_AC63.5 U4_AC64.5 U4_AC71.5 U4_AC72.5 U4_AC73.5 U4_AC74.5 U4_AC81.5 U4_AC82.5 U4_AC83.5 U4_AC84.5 U5.5 U6_SD1.12 U6_SD2.12 U6_SD3.12 U6_SD4.12 U7_SD1.8 U7_SD2.8 U7_SD3.8 U7_SD4.8 U8_SD1.5 U8_SD2.5 U8_SD3.5 U8_SD4.5 U9_SD1.5 U9_SD2.5 U9_SD3.5 U9_SD4.5 U10.1 U12_MUX_LED1.16 U12_MUX_LED2.16 U12_MUX_LED3.16 U12_MUX_LED4.16 U12_MUX_LED5.16 U12_MUX_S1.16 U12_MUX_S2.16 U12_MUX_S3.16 U12_MUX_S4.16 U12_MUX_S5.16 U15.5 | length 311
  Top Layer w0.254: R27_MUX_S1.2@20.21,22.034 v1(21.026,22.034) ; R27_MUX_S2.2@21.124,29.718 v1(21.959,29.718) ; R17_SD2.2@35.7,35.457 35.7,34.857 36.194,34.363 R15_SD2.2@36.194,33.275 ; v1(36.248,32.595) R15_SD2.2@36.248,33.275 ; v1(36.664,19.732) R15_SD1.2@36.664,20.415 ; R15_SD1.2@36.753,20.504 36.65,20.607 R18_SD1.2@36.65,21.507 R18_SD1.2@36.761,21.618 ; R17_SD1.2@41.504,22.487 41.504,22.047 v1(41.758,21.793) ; v1(43.952,17.272) C45_MUX_LED1.2@44.936,17.272 44.128,18.08 C44_MUX_LED1.2@44.128,18.288 44.128,18.525 44.679,19.075 U12_MUX_LED1.16@44.907,19.075 ; U12_MUX_LED2.16@44.332,32.207 44.077,31.952 C44_MUX_LED2.2@44.077,31.471 44.077,31.234 44.563,30.748 C45_MUX_LED2.2@44.563,30.378 v1(44.563,29.478) ; v1(53.345,20.452) R27_MUX_LED1.2@53.345,21.276 ; R1.5@58.782,33.035 v1(59.36,33.613) ; U1.23@64.44,30.607 65.007,30.607 C9.2@65.405,31.005 v1(65.405,31.801) ; C10.2@66.743,32.925 67.75,32.925 C14.2@68.05,33.225 ; U2.1@67.916,31.312 v1(67.916,31.947) 68.49,31.947 C15.2@68.725,32.182 ; v1@68.054,32.085 C14.2@68.054,33.064 ; U2.2@68.156,30.154 U2.1@68.156,31.059 ; R4.2@70.985,32.165 R3.2@72.075,32.165 72.05,32.14 v1(72.05,31.53) ; U15.5@79.321,24.725 v1(79.321,23.597) 79.624,23.9 C12.2@80.201,23.9 ; R7.2@83.275,25.688 84.013,25.688 R27_MUX_LED4.2@84.025,25.7 84.85,24.875 v1(85.775,24.875) ; R6.2@83.812,22.428 v1(84.531,22.428) ; R27_MUX_S3.2@84.443,31.242 v1(85.233,31.242) ; R17_SD3.2@97.85,36.475 98.575,35.75 v1(99.235,35.75) R18_SD3.2@99.235,35.064 99.235,34.163 R15_SD3.2@99.338,34.061 ; v1(99.772,19.438) R15_SD4.2@99.772,20.135 ; R15_SD4.2@99.861,20.224 99.758,20.327 R18_SD4.2@99.758,21.228 R18_SD4.2@99.869,21.338 ; R17_SD4.2@104.055,24.917 104.865,24.107 v1(104.865,21.514) ; U12_MUX_LED3.16@106.333,32.817 107.685,32.817 108.102,32.4 v1(108.102,32.182) 108.102,31.336 C44_MUX_LED3.2@108.009,31.242 107.526,30.76 C45_MUX_LED3.2@107.526,30.201 ; v1(106.756,16.866) 107.599,16.866 C45_MUX_LED4.2@107.65,16.916 ; U12_MUX_LED4.16@107.315,18.818 106.536,18.039 C44_MUX_LED4.2@106.536,18.031 C45_MUX_LED4.2@107.65,16.916 ; C45_MUX_LED4.2@107.91,16.916 C45_MUX_LED4.2@107.65,16.916 ; v1(112.649,25.451) R27_MUX_S5.2@112.649,26.17 ; C45_MUX_LED5.2@116.826,22.606 116.826,23.568 C44_MUX_LED5.2@116.721,23.673 116.764,23.673 U12_MUX_LED5.16@117.712,24.621 119.065,24.621 119.463,25.019 119.405,25.076 v1(119.405,25.273)
  Bottom Layer w0.254: v1(9.878,1.608) 10.139,1.347 ; v1(10.353,34.339) 10.614,34.6 C21_AC42.2@10.614,35.515 10.614,36.551 C20_AC42.2@10.696,36.633 10.721,36.633 11.314,37.226 11.314,39.134 U4_AC42.5@10.821,39.627 ; U4_AC31.5@10.956,16.613 11.449,16.12 11.449,14.212 ; U4_AC12.5@12.73,52.911 13.223,53.404 15.131,53.404 15.724,52.812 C20_AC12.2@15.724,52.787 15.806,52.705 C21_AC12.2@16.841,52.705 17.756,52.705 v1(18.017,52.444) ; U12_MUX_S1.16@14.046,20.511 14.01,20.511 C44_MUX_S1.2@13.278,21.243 13.278,21.682 v1(13.867,22.272) 13.93,22.335 C45_MUX_S1.2@15.212,22.335 C45_MUX_S1.2@15.161,22.284 ; U12_MUX_S2.16@14.655,35.666 14.62,35.666 C44_MUX_S2.2@13.888,36.398 13.888,36.838 v1(14.489,37.44) 15.77,37.44 C45_MUX_S2.2@15.821,37.49 ; v1(15.816,40.59) 16.077,40.329 C21_AC22.2@16.992,40.329 18.028,40.329 C20_AC22.2@18.11,40.247 18.11,40.222 18.702,39.63 20.61,39.63 U4_AC22.5@21.103,40.123 ; U4_AC11.5@18.87,13.875 19.363,14.368 21.271,14.368 ; U4_AC32.5@24.819,52.993 25.312,53.486 27.22,53.486 27.813,52.894 C20_AC32.2@27.813,52.869 27.895,52.787 C21_AC32.2@28.93,52.787 29.845,52.787 v1(30.106,52.526) ; v1(25.298,36.183) 25.852,36.737 U8_SD2.5@26.466,36.737 27.282,37.552 C34_SD2.2@27.552,37.552 ; U8_SD1.5@27.029,23.764 27.029,24.406 v1(26.797,24.638) C34_SD1.2@28.002,24.638 ; v1(27.856,40.624) 28.117,40.363 C21_AC62.2@29.032,40.363 30.068,40.363 C20_AC62.2@30.15,40.281 30.59,39.841 30.59,39.816 30.743,39.663 32.651,39.663 U4_AC62.5@33.144,40.156 ; C32_SD2.2@28.335,31.206 28.814,30.726 C33_SD2.2@28.814,30.407 ; C33_SD2.2@28.814,30.063 C33_SD2.2@28.814,30.407 ; C33_SD1.2@29.402,17.018 28.948,17.472 C32_SD1.2@28.948,18.161 29.969,18.161 v1(30.034,18.226) U7_SD1.8@30.034,19.162 ; U7_SD2.8@29.587,32.177 v1(29.587,31.18) C33_SD2.2@28.814,30.407 ; U4_AC61.5@30.814,14.03 31.307,14.523 33.215,14.523 33.808,13.931 C20_AC61.2@33.808,13.906 33.89,13.824 C21_AC61.2@34.926,13.824 35.841,13.824 ; U4_AC82.5@36.954,52.884 37.447,53.377 39.355,53.377 39.948,52.784 C20_AC82.2@39.948,52.759 40.03,52.677 C21_AC82.2@41.066,52.677 v1(42.39,52.677) ; U6_SD2.12@39.573,34.68 v1(41.283,34.68) 41.297,34.693 41.297,35.33 41.36,35.393 C31_SD2.1@42.393,35.393 ; v1(39.947,40.522) 40.208,40.261 C21_AC52.2@41.123,40.261 42.159,40.261 C20_AC52.2@42.24,40.179 42.24,40.154 42.833,39.562 44.741,39.562 U4_AC52.5@45.234,40.055 ; U6_SD1.12@39.964,21.618 41.582,21.618 v1(41.758,21.793) 41.758,22.352 ; C29_SD1.2@41.758,22.893 41.758,22.352 ; U4_AC71.5@42.803,13.992 43.296,14.485 45.204,14.485 45.797,13.892 C20_AC71.2@45.797,13.867 ; C31_SD1.1@43.002,22.389 41.794,22.389 41.758,22.352 ; v1(43.51,29.566) 43.51,29.922 C36_SD2.2@44.006,30.418 43.902,30.523 C35_SD2.2@43.902,31.51 43.902,32.224 U9_SD2.5@44.316,32.638 ; U9_SD1.5@43.939,19.467 43.939,18.778 C35_SD1.2@43.601,18.44 43.601,17.853 C36_SD1.2@43.096,17.348 43.876,17.348 v1(43.952,17.272) ; R27_MUX_LED2.2@47.758,29.616 v1(47.758,30.537) ; U4_AC72.5@48.918,52.863 49.411,53.356 51.319,53.356 51.911,52.764 C20_AC72.2@51.911,52.739 51.993,52.657 C21_AC72.2@53.029,52.657 53.92,52.657 v1(54.135,52.442) ; v1(62.657,11.142) 62.918,11.403 C21_AC24.2@62.918,12.318 62.918,13.354 C20_AC24.2@63,13.436 63.025,13.436 63.618,14.028 63.618,15.937 U4_AC24.5@63.125,16.43 ; U4_AC13.5@63.063,39.684 63.556,39.191 63.556,37.283 62.963,36.69 C20_AC13.2@62.938,36.69 62.856,36.608 C21_AC13.2@62.856,35.573 63.018,35.411 v1(63.881,35.411) ; v1(64.033,18.521) C21_AC34.2@65.198,18.521 65.198,17.485 C20_AC34.2@65.116,17.403 65.091,17.403 64.408,16.72 64.408,14.992 U4_AC34.5@64.992,14.409 ; U4_AC43.5@64.962,37.362 64.469,37.855 64.469,39.764 65.061,40.356 C20_AC43.2@65.086,40.356 65.168,40.438 C21_AC43.2@65.168,41.474 65.168,42.365 v1(65.383,42.58) ; v1(72.05,31.53) 72.05,31.5 72.5,31.05 U1.9@73.576,31.05 73.672,30.954 74.406,30.954 75,30.36 C2.2@75,30.35 C1.2@75.9,30.35 ; v1(73.88,1.703) 74.141,1.442 C21_AC14.2@75.056,1.442 76.092,1.442 C20_AC14.2@76.174,1.36 76.174,1.335 76.767,0.742 78.675,0.742 U4_AC14.5@79.168,1.235 ; v1(75.659,21.229) C44_MUX_S4.2@76.632,21.229 ; U4_AC23.5@76.816,52.941 77.309,53.434 79.217,53.434 79.81,52.841 C20_AC23.2@79.81,52.816 79.892,52.734 C21_AC23.2@80.927,52.734 81.843,52.734 v1(82.104,52.473) ; U12_MUX_S3.16@77.393,36.682 77.358,36.682 C44_MUX_S3.2@76.626,37.414 76.626,37.916 v1(77.241,38.532) 78.534,38.532 C45_MUX_S3.2@78.559,38.506 C45_MUX_S3.2@78.508,38.456 ; U12_MUX_S4.16@77.4,20.497 77.364,20.497 C44_MUX_S4.2@76.632,21.229 ; C45_MUX_S4.2@78.565,22.321 78.292,22.047 77.452,22.047 76.634,21.229 C44_MUX_S4.2@76.632,21.229 ; v1(79.946,40.502) 80.161,40.287 C21_AC33.2@81.052,40.287 82.087,40.287 C20_AC33.2@82.169,40.205 82.169,40.18 82.762,39.587 84.67,39.587 U4_AC33.5@85.163,40.08 ; U4_AC44.5@82.855,13.96 83.423,14.529 85.479,14.529 85.849,14.159 C20_AC44.2@85.849,13.836 85.93,13.754 C21_AC44.2@86.966,13.754 87.857,13.754 v1(88.072,13.539) ; v1(85.794,1.655) 86.055,1.394 C21_AC64.2@86.97,1.394 88.005,1.394 C20_AC64.2@88.087,1.312 88.087,1.287 88.68,0.695 90.588,0.695 U4_AC64.5@91.081,1.188 ; v1(88.484,37.234) U8_SD3.5@89.507,37.234 89.507,37.302 C34_SD3.2@90.381,38.176 ; U4_AC63.5@88.859,52.893 89.352,53.386 91.26,53.386 91.853,52.793 C20_AC63.2@91.853,52.768 91.935,52.686 C21_AC63.2@92.971,52.686 93.886,52.686 v1(94.147,52.425) ; v1(89.009,23.495) U8_SD4.5@90.094,23.495 90.094,23.538 C34_SD4.2@91.042,24.486 ; C32_SD3.2@91.407,31.572 91.864,31.115 91.855,31.115 91.855,30.904 ; C33_SD3.2@91.855,30.56 91.855,30.904 ; v1(91.862,40.591) 92.123,40.33 C21_AC83.2@93.038,40.33 94.074,40.33 C20_AC83.2@94.156,40.248 94.156,40.223 94.748,39.63 96.656,39.63 U4_AC83.5@97.149,40.123 ; C33_SD4.2@92.47,16.531 92.47,17.123 C32_SD4.2@91.991,17.602 92.797,17.602 v1(93.142,17.947) U7_SD4.8@93.142,18.883 ; U7_SD3.8@92.628,32.674 v1(92.628,31.678) 91.855,30.904 ; U4_AC84.5@94.827,14.003 95.32,14.496 97.229,14.496 97.821,13.903 C20_AC84.2@97.821,13.878 97.903,13.796 C21_AC84.2@98.939,13.796 99.83,13.796 v1(100.045,13.581) ; v1(97.883,1.7) 98.144,1.439 C21_AC74.2@99.059,1.439 100.095,1.439 C20_AC74.2@100.177,1.358 100.177,1.333 100.77,0.74 102.678,0.74 U4_AC74.5@103.171,1.233 ; U4_AC73.5@100.892,52.909 101.385,53.402 103.293,53.402 103.886,52.81 C20_AC73.2@103.886,52.785 103.968,52.703 C21_AC73.2@105.003,52.703 105.894,52.703 v1(106.109,52.488) ; U6_SD3.12@102.614,35.178 v1(104.324,35.178) 104.337,35.191 104.337,35.828 104.4,35.891 C31_SD3.1@105.433,35.891 ; U6_SD4.12@103.072,21.338 104.69,21.338 v1(104.865,21.514) 104.865,22.073 ; v1(103.919,40.502) 104.134,40.287 C21_AC53.2@105.024,40.287 106.06,40.287 C20_AC53.2@106.142,40.205 106.142,40.18 106.735,39.587 108.643,39.587 U4_AC53.5@109.136,40.08 ; C36_SD4.2@104.756,16.739 105.791,16.739 v1@105.783,16.747 ; C29_SD4.2@104.865,22.614 104.865,22.073 ; v1(105.639,16.747) v1@105.783,16.747 ; C31_SD4.1@106.11,22.109 104.902,22.109 104.865,22.073 ; v1(106.189,30.005) C36_SD3.2@106.189,30.886 106.683,31.38 C35_SD3.2@106.683,31.953 107.356,32.627 U9_SD3.5@107.356,33.136 ; U4_AC54.5@106.867,13.997 107.36,14.49 109.268,14.49 109.861,13.897 C20_AC54.2@109.861,13.872 109.943,13.791 C21_AC54.2@110.978,13.791 111.869,13.791 v1(112.084,13.576) ; U9_SD4.5@107.046,19.187 107.046,18.75 C35_SD4.2@106.161,17.864 106.161,17.108 105.799,16.747 v1@105.783,16.747 ; v1(108.102,32.182) 109.991,32.182 R27_MUX_LED3.2@110.917,33.108 ; v1(109.854,1.686) 110.115,1.425 C21_AC25.2@111.03,1.425 112.065,1.425 C20_AC25.2@112.147,1.343 112.147,1.318 112.74,0.726 114.648,0.726 U4_AC25.5@115.141,1.219 ; R27_MUX_S4.2@112.09,23.243 v1(112.09,24.087) ; U4_AC15.5@112.912,52.935 113.405,53.428 115.313,53.428 115.906,52.836 C20_AC15.2@115.906,52.811 115.988,52.729 C21_AC15.2@117.024,52.729 117.914,52.729 v1(118.129,52.514) ; U12_MUX_S5.16@116.978,24.616 U12_MUX_S5.16@116.942,24.616 117.307,24.252 117.307,23.895 C44_MUX_S5.2@117.35,23.851 117.35,22.926 C45_MUX_S5.2@117.249,22.825 v1(117.249,21.501) ; v1(119.405,25.273) 120.973,25.273 R27_MUX_LED5.2@120.975,25.275 ; C24.2@121.045,31.039 121.045,32.102 C19.2@121.125,32.182 121.964,32.182 v1(122.018,32.236) U5.5@122.018,33.108 ; U3.5@121.925,21.889 123.091,21.889 C23.2@123.266,22.064 123.37,21.96 C22.2@124.384,21.96 v1(125.668,21.96)
  other v1: 33.824,1.404 21.74,1.608 45.87,1.7 10.489,11.326 24.158,13.408 48.09,13.524 36.102,13.563 49.75,26.332 50.375,26.332
3V3: C11.2 C37.2 P1.1 P1.20 R3.2@65.95,33.725 R4.2@65.95,32.766 R20.2 U1.24 U10.6 | length 13.6
  Top Layer w0.254: U1.24@64.44,31.115 v1(64.44,31.801) 64.499,31.86 C11.2@64.499,32.715 ; v1(72.804,22.451) 73.25,22.005 R20.2@73.25,21.754
  GND w0.254: v1@72.791,22.464 v1(72.804,22.451)
  Bottom Layer w0.254: P1.1@58.285,21.968 58.746,21.507 v1(58.83,21.507) ; v1(64.44,31.801) 65.116,31.125 65.7,31.125 65.95,31.375 R4.2@65.95,32.766 R3.2@65.95,33.725 ; P1.20@69.715,26.032 70.146,26.463 v1(70.764,26.463) 71.5,25.728 71.5,23.674 72.723,22.451 v1(72.804,22.451)
  other v1: 51.65,26.325 52.225,26.332
A0: R1.1 U1.4@59.461,29.616 U12_MUX_LED1.11 U12_MUX_LED2.11 U12_MUX_LED3.11 U12_MUX_LED4.11 U12_MUX_LED5.11 U12_MUX_S1.11 U12_MUX_S2.11 U12_MUX_S3.11 U12_MUX_S4.11 U12_MUX_S5.11 | length 211.8
  Top Layer w0.254: v1(16.51,26.645) 16.51,17.297 v1(16.535,17.272) ; U12_MUX_LED2.11@44.332,35.457 45.518,35.457 v1(45.822,35.154) ; U12_MUX_LED1.11@44.907,22.325 v1(45.441,22.325) 46.194,22.325 47.973,24.104 54.943,24.104 55.044,24.003 55.245,24.003 v1(55.423,23.825) 56.236,23.825 56.697,23.364 57.94,22.12 60.11,22.12 60.367,22.377 65.532,22.377 65.838,22.683 66.427,22.683 66.503,22.758 66.743,22.758 67.047,22.454 70.028,22.454 70.558,22.984 72.655,22.984 73.406,22.984 v1(73.508,22.882) 76.209,22.882 v1@76.4,22.691 ; R1.1@56.382,31.735 56.382,31.535 58.301,29.616 v1(58.496,29.616) U1.4@59.461,29.616 ; v1@76.491,22.6 v1@76.4,22.691 ; v1(78.918,17.247) 78.918,20.223 76.416,22.725 v1(76.4,22.725) v1@76.4,22.691 ; v1(88.35,26) 88.796,26.446 94.367,26.446 94.594,26.22 97.63,26.22 97.634,26.215 97.861,26.215 v1(98.013,26.063) ; v1(105.968,27.5) 106.865,27.5 107.505,28.14 116.591,28.14 116.689,28.042 117.541,28.042 U12_MUX_LED5.11@117.712,27.871 119.068,27.871 v1(119.151,27.788) ; U12_MUX_LED3.11@106.333,36.067 105.307,36.067 104.857,35.617 104.857,34.957 103.062,33.161 103.062,29.396 104.2,28.258 v1(104.2,27.5) 104.2,27.239 105.127,26.312 105.449,26.312 107.533,24.228 108.496,24.228 109,23.724 109,22.901 108.167,22.068 U12_MUX_LED4.11@107.315,22.068
  Bottom Layer w0.254: U12_MUX_S1.11@14.046,17.261 14.131,17.346 14.204,17.272 v1(16.535,17.272) ; U12_MUX_S2.11@15.508,32.416 U12_MUX_S2.11@14.655,32.416 13.657,32.416 12.268,31.027 12.268,28.316 13.965,26.619 16.485,26.619 v1(16.51,26.645) 16.662,26.797 30.054,26.797 30.943,25.908 32.14,25.908 32.445,25.603 35.676,25.603 36.184,25.095 40.772,25.095 40.797,25.121 42.879,25.121 44.526,23.474 44.526,22.805 44.889,22.442 45.324,22.442 v1(45.441,22.325) ; v1(45.822,35.154) 45.415,34.747 45.415,28.065 49.096,24.384 54.508,24.384 55.067,23.825 v1(55.423,23.825) 56.33,23.825 57.429,24.925 57.429,29.388 57.658,29.616 v1(58.496,29.616) ; v1(73.508,22.882) 73.508,23.03 79.248,28.77 79.248,32.319 79.019,32.547 79.019,32.659 78.246,33.432 U12_MUX_S3.11@77.393,33.432 ; v1(76.4,22.725) 77.629,22.725 79.718,24.814 84.861,24.814 86.047,26 v1(88.35,26) ; U12_MUX_S4.11@77.4,17.247 v1(78.918,17.247) ; v1(98.013,26.063) 98.9,26.063 99.372,26.535 101.343,26.535 102.307,27.5 v1(104.2,27.5) v1(105.968,27.5) ; U12_MUX_S5.11@116.942,27.866 119.202,27.866 119.151,27.816 v1(119.151,27.788)